# EAGLE board PCTx_1.4.3 (EAGLE 5.00)
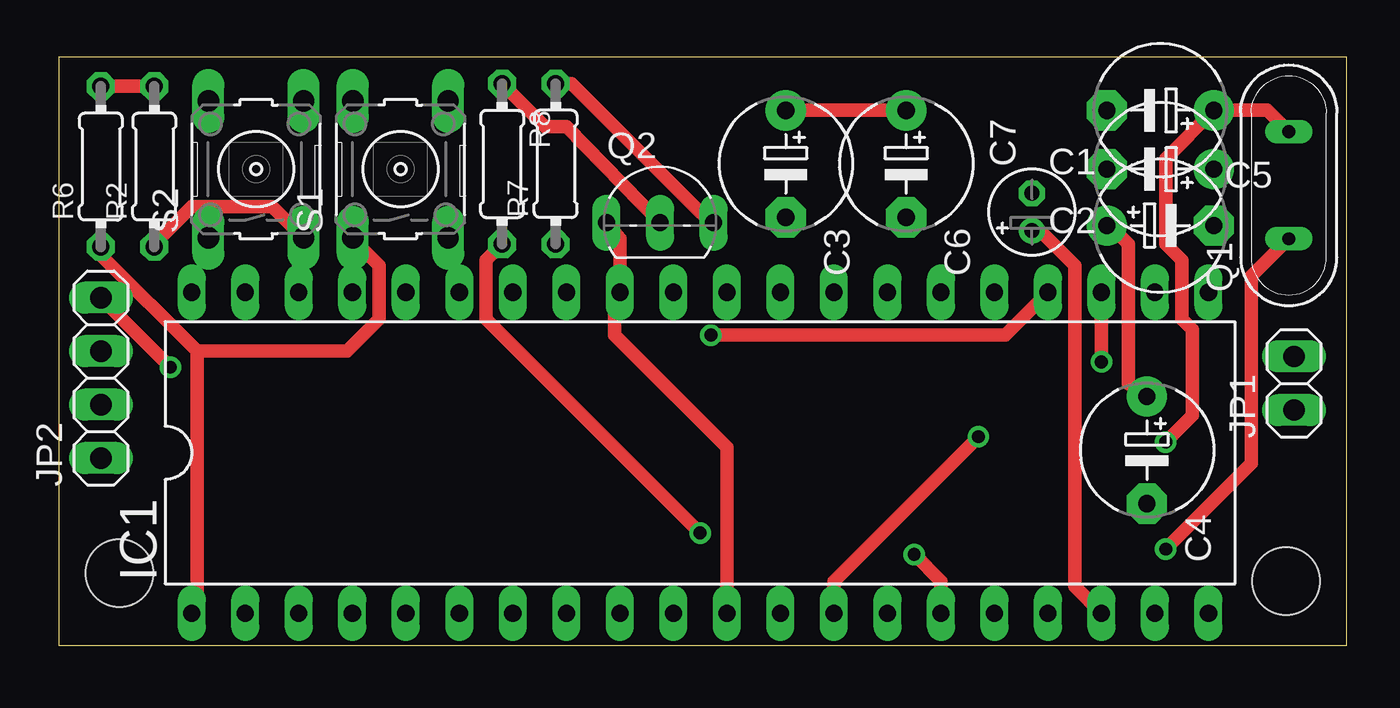
[diagram p0: board, top side]
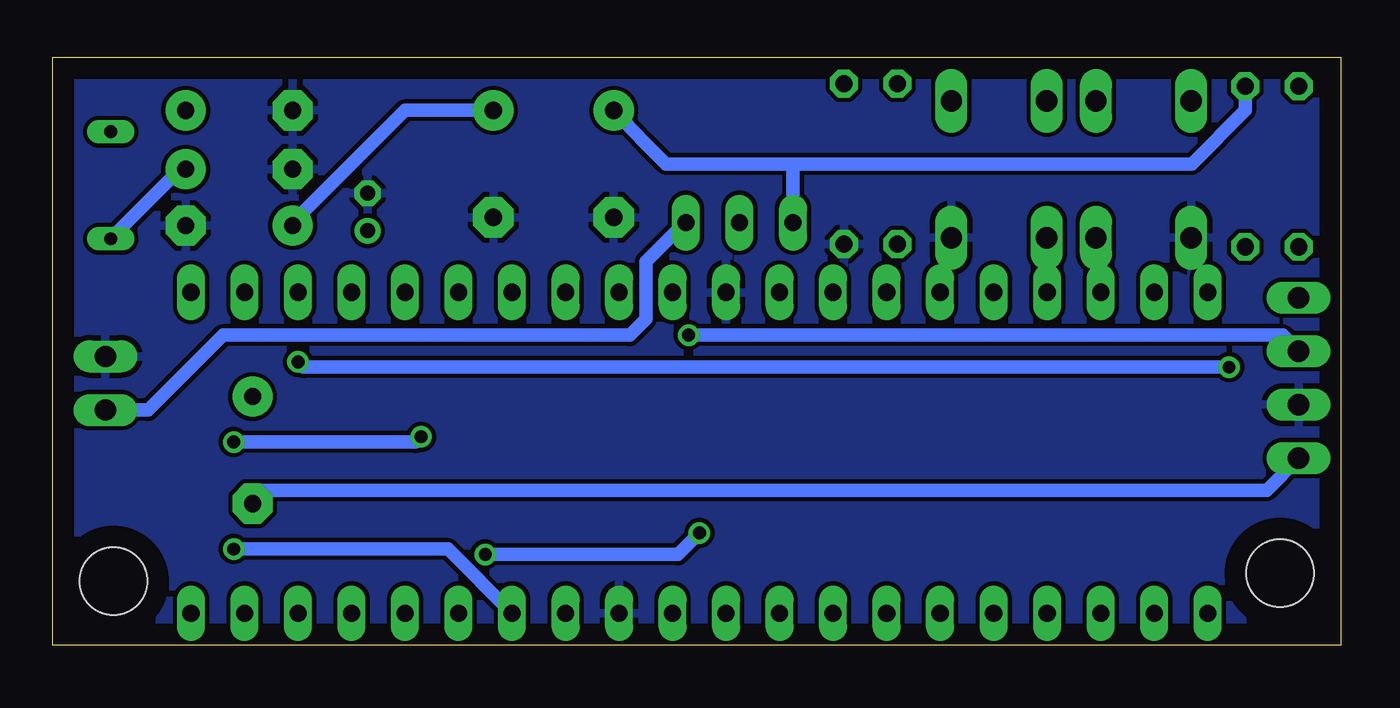
[diagram p1: board, bottom side, seen from below]

Size 61.14 x 27.93 mm. Coordinates in mm from the lower left corner, seen from the top.
Outline: 0,0 61.14,0 61.14,27.93 0,27.93 0,0
Copper layers (1*16): Top 0.035mm / dielectric 1.5mm / Bottom 0.035mm
Design rules "default *": minimum track width 25mil, minimum drill 24mil, track to track 8mil, track to pad 8mil, pad to pad 8mil, via to via 8mil, smd to smd 8mil, copper to edge 40mil, drill to drill 8mil, minimum pad ring 10mil, minimum via ring 8mil, stop-mask expansion 4mil, vias tented up to drill 0mil, thermal gap 10mil
Holes 3.2 mm at 2.88,3.42 58.25,3.04

## Footprints (pad centres in the part's own frame; a part is rotated, then mirrored left to right if it is on the bottom)
E5-6 = drill 0.813 pad 1.905 round: + -2.54,0 | drill 0.813 pad 1.905 octagon: - 2.54,0
E1,8-4 = drill 0.711 pad 1.168 round: + -0.889,0 | drill 0.711 pad 1.168 octagon: - 0.889,0
DIL40 = drill 0.813 long: 1 -24.13,-7.62; 2 -21.59,-7.62; 3 -19.05,-7.62; 4 -16.51,-7.62; 5 -13.97,-7.62; 6 -11.43,-7.62; 7 -8.89,-7.62; 8 -6.35,-7.62; 9 -3.81,-7.62; 10 -1.27,-7.62; 11 1.27,-7.62; 12 3.81,-7.62; 13 6.35,-7.62; 14 8.89,-7.62; 15 11.43,-7.62; 16 13.97,-7.62; 17 16.51,-7.62; 18 19.05,-7.62; 19 21.59,-7.62; 20 24.13,-7.62; 21 24.13,7.62; 22 21.59,7.62; 23 19.05,7.62; 24 16.51,7.62; 25 13.97,7.62; 26 11.43,7.62; 27 8.89,7.62; 28 6.35,7.62; 29 3.81,7.62; 30 1.27,7.62; 31 -1.27,7.62; 32 -3.81,7.62; 33 -6.35,7.62; 34 -8.89,7.62; 35 -11.43,7.62; 36 -13.97,7.62; 37 -16.51,7.62; 38 -19.05,7.62; 39 -21.59,7.62; 40 -24.13,7.62
1X02 = drill 1.016 long: 1 -1.27,0; 2 1.27,0
1X04 = drill 1.016 long: 1 -3.81,0; 2 -1.27,0; 3 1.27,0; 4 3.81,0
QS = drill 0.61 long: 1 -2.54,0; 2 2.54,0
TO92-EBC = drill 0.813 long: B 0,-1.27; C -2.54,-1.27; E 2.54,-1.27
0204/7 = drill 0.813 octagon: 1 -3.81,0; 2 3.81,0
B3F-10XX = drill 1.016 long: 1 -3.251,2.261; 2 3.251,2.261; 3 -3.251,-2.261; 4 3.251,-2.261

## Placement (x,y rotation side)
C1  [E5-6]  52.29,25.4 180 top
C2  [E5-6]  52.29,22.6 180 top
C3  [E5-6]  34.51,22.85 270 top
C4  [E5-6]  51.65,9.27 270 top
C5  [E5-6]  52.29,19.93 0 top
C6  [E5-6]  40.22,22.85 270 top
C7  [E1,8-4]  46.19,20.57 90 top
IC1  PIC18F4550_40  [DIL40]  30.44,9.14 0 top
JP1  [1X02]  58.64,12.44 90 top
JP2  [1X04]  1.99,12.7 90 top
Q1  [QS]  58.38,21.84 90 top
Q2  BC338-16  [TO92-EBC]  28.54,21.33 0 top
R2  [0204/7]  4.53,22.73 90 top
R6  [0204/7]  1.99,22.73 90 top
R7  [0204/7]  23.58,22.85 90 top
R8  [0204/7]  21.04,22.85 270 top
S1  [B3F-10XX]  16.22,22.6 90 top
S2  [B3F-10XX]  9.36,22.6 90 top

## Library data of the parts
C1-C7 R2 R6-R8 = rcl
IC1 = microchip
JP1 JP2 = pinhead
Q1 = special
Q2 = transistor-npn
S1 S2 = switch-omron

## Nets
B$3: C3.+ C4.+ C5.+ C6.+ IC1.11 IC1.32 Q2.C R2.2 R6.2
GND: C1.- C2.- C3.- C5.- C6.- C7.- IC1.12 IC1.31 JP1.2 JP2.2 R7.1 S1.3 S2.1
N$1: C4.- JP2.1
N$2: JP1.1 Q2.E R7.2
N$3: IC1.38 R2.1 S2.3
N$4: IC1.23 JP2.4
N$5: C2.+ IC1.14 Q1.1
N$6: C7.+ IC1.18
N$9: IC1.24 JP2.3
N$12: IC1.1 R6.1 S1.1
N$14: IC1.15 R8.2
N$15: C1.+ IC1.13 Q1.2
N$16: Q2.B R8.1

## Tracks (layer width: path | path; a pad name or v marks a point on that pad's centre or on a via)
B$3
  Top 0.635: C4.+ 50.76,12.44 50.76,19.04 49.75,20.06 C5.+ | C3.+ C6.+ | R6.2 R2.2 | Q2.C 26.63,19.3 IC1.32 26.38,16.25 26.38,14.73 31.71,9.39 IC1.11
  Bottom 0.635: C5.+ 50,19.81 44.41,25.4 C6.+ | R2.2 4.53,25.4 7.07,22.85 26,22.85 | C3.+ 33.03,23.87 32.02,22.85 26,22.85 | 26,22.85 Q2.C
GND
  pour Bottom (isolate 0.254): 0.01,27.91 61.15,27.91 61.15,0.02 0.01,0.02
  pour Bottom: 0.01,27.91 61.15,27.91 61.15,0.02 0.01,0.02
N$1
  Bottom 0.635: JP2.1 3.52,7.36 51.52,7.36 C4.-
N$2
  Top 0.635: R7.2 24.35,26.66 30.44,20.57 Q2.E
  Bottom 0.635: JP1.1 56.6,11.17 53.05,14.73 33.74,14.73 32.98,15.49 32.98,18.21 31.18,20.01 Q2.E
N$3
  Top 0.635: IC1.38 11.39,18.79 S2.3 | R2.1 4.53,19.04 | R2.1 4.53,18.79 | S2.3 11.65,19.3 | R2.1 4.79,19.3 6.31,20.82 10.12,20.82 10.88,20.06 S2.3
N$4  (via drill 0.61)
  Top 0.635: v49.49,13.46 IC1.23 | JP2.4 v5.3,13.2
  Bottom 0.635: v49.49,13.46 49.24,13.2 v5.3,13.2
N$5  (via drill 0.61)
  Top 0.635: v52.54,4.57 56.6,8.63 56.6,17.52 Q1.1
  Bottom 0.635: Q1.1 55.08,22.6 C2.+ | IC1.14 42.38,4.57 v52.54,4.57
N$6
  Top 0.635: IC1.18 48.22,2.79 48.22,18.03 46.44,19.81 C7.+
N$9  (via drill 0.61)
  Top 0.635: IC1.24 44.92,14.73 v30.95,14.73
  Bottom 0.635: v30.95,14.73 2.76,14.73 JP2.3
N$12
  Top 0.635: 6.57,13.97 6.57,2.03 IC1.1 | S1.1 14.19,19.04 15.2,18.03 15.2,15.49 13.68,13.97 6.57,13.97 | R6.1 1.99,18.54 6.57,13.97
N$14  (via drill 0.61)
  Top 0.635: R8.2 20.28,18.28 20.28,15.49 v30.44,5.33 | v40.6,4.31 41.87,3.04 IC1.15
  Bottom 0.635: v30.44,5.33 31.46,4.31 v40.6,4.31
N$15  (via drill 0.61)
  Top 0.635: Q1.2 57.37,25.4 C1.+ 52.54,23.11 52.54,19.04 53.3,18.28 53.3,15.49 53.81,14.98 53.81,10.92 v52.54,9.65 | v43.65,9.9 36.79,3.04 IC1.13
  Bottom 0.635: v43.65,9.9 43.9,9.65 v52.54,9.65
N$16
  Top 0.635: R8.1 23.08,24.63 24.09,24.63 Q2.B

## Text on the board
Text: www.endurance-rc.com | PCTx v1.4.2 | PROGRAM | RESET | D- | D+ | GND | GND | +5V | PPM